# Altium PCB Archim_Panel_1.0a.PcbDoc
Units mil, origin at the board's own origin, x right, y up, seen from the top; angles counter-clockwise.
Board outline 4606.1 x 8609.74 mil, 6 copper layers (Top Layer, Top GND, Power Plane, Mid1, Bot GND, Bottom Layer), stack 61.234 mil thick; 8 components, 0 nets, 12 pads, 0 vias.
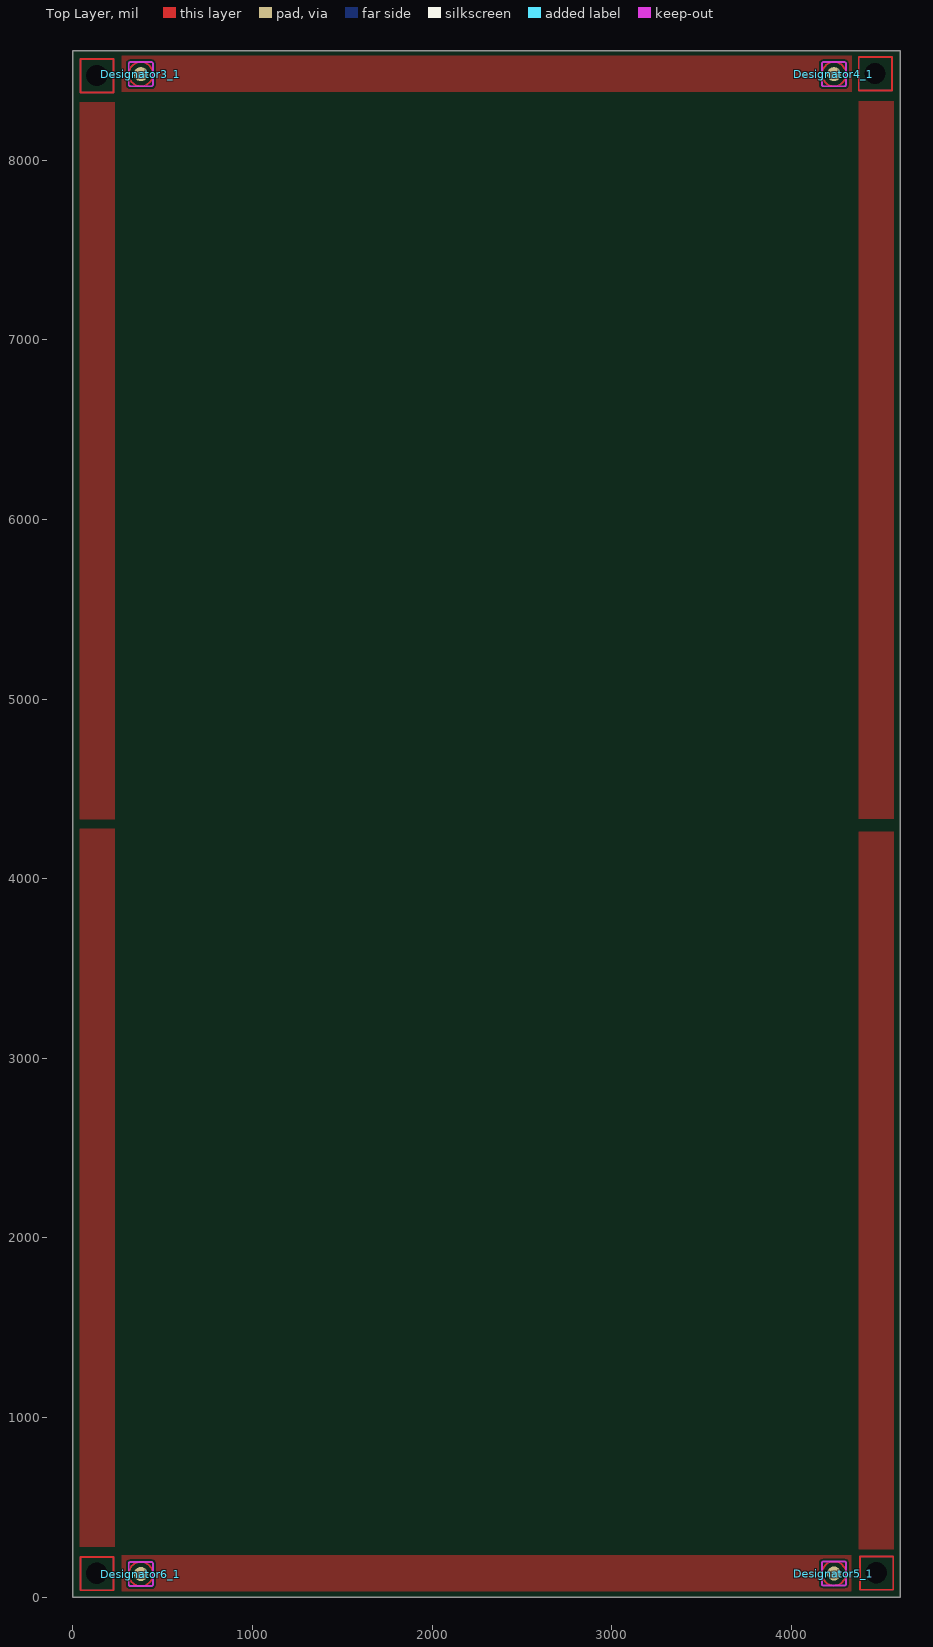
[diagram p0: Top Layer view]
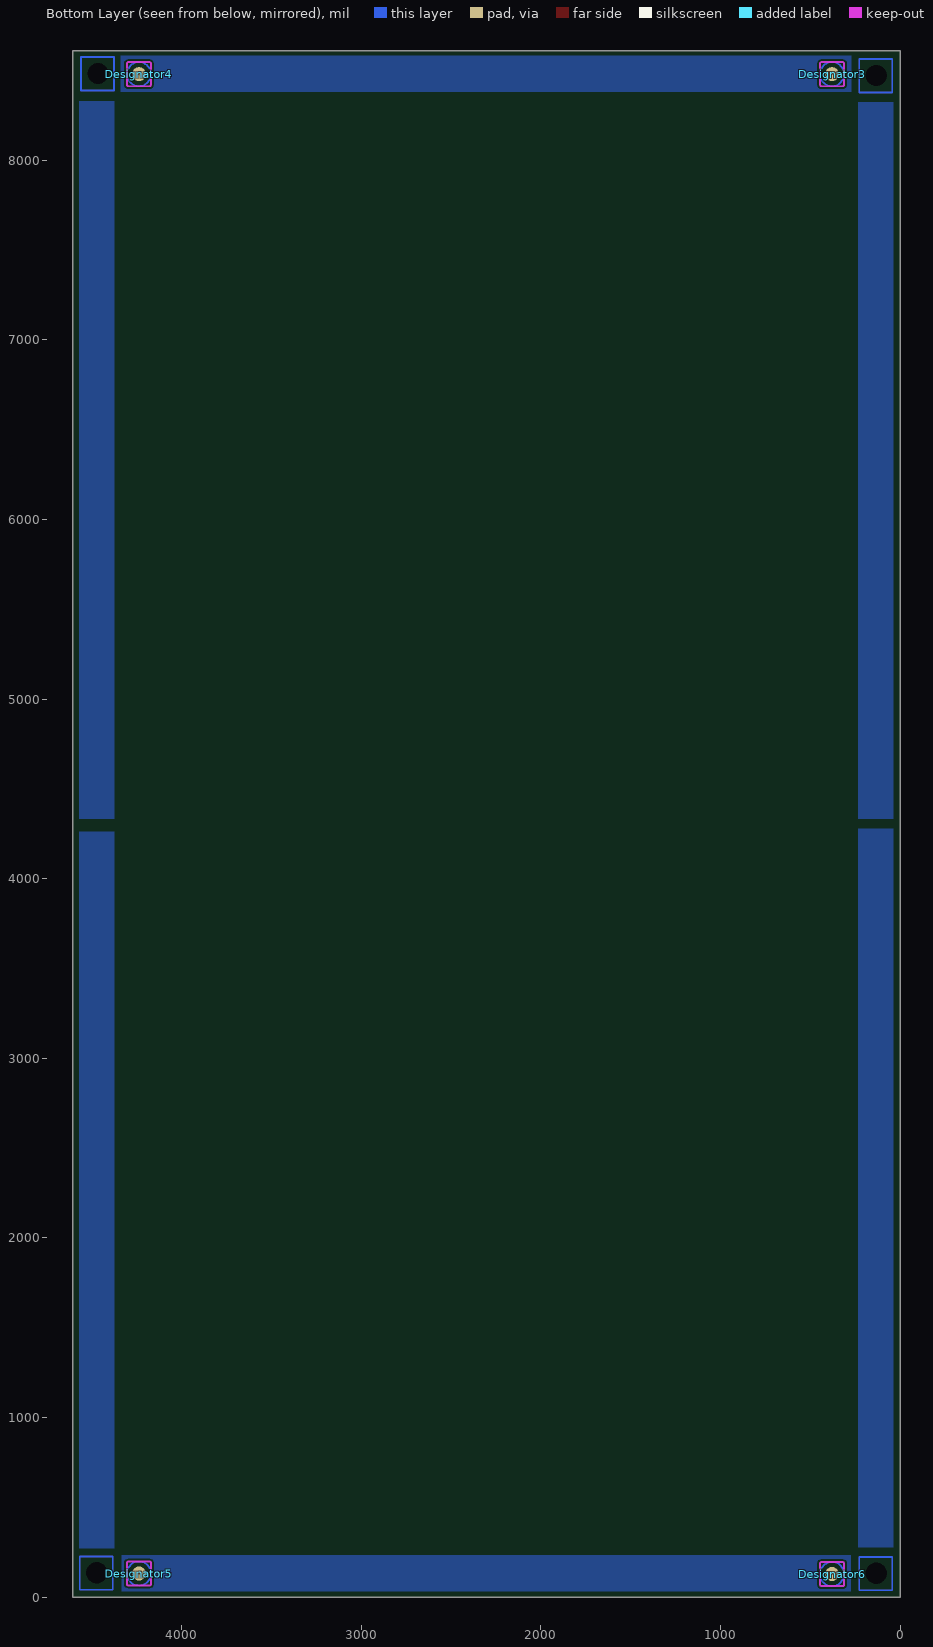
[diagram p1: Bottom Layer view, seen from below]
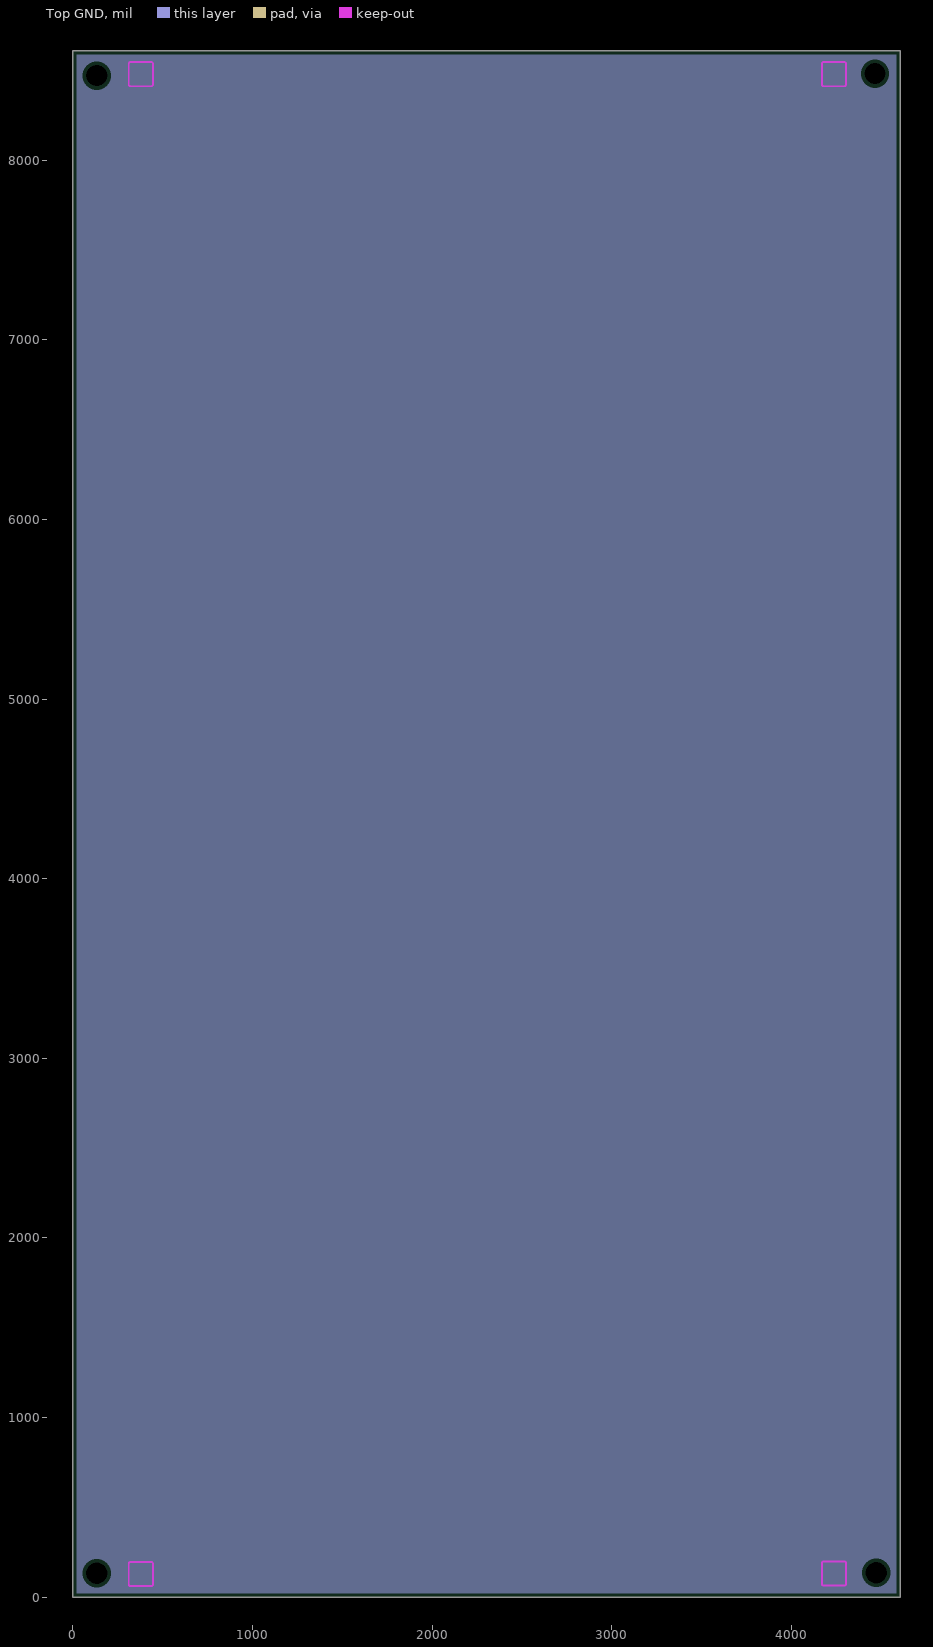
[diagram p2: Top GND, clearances drawn from the general rule]
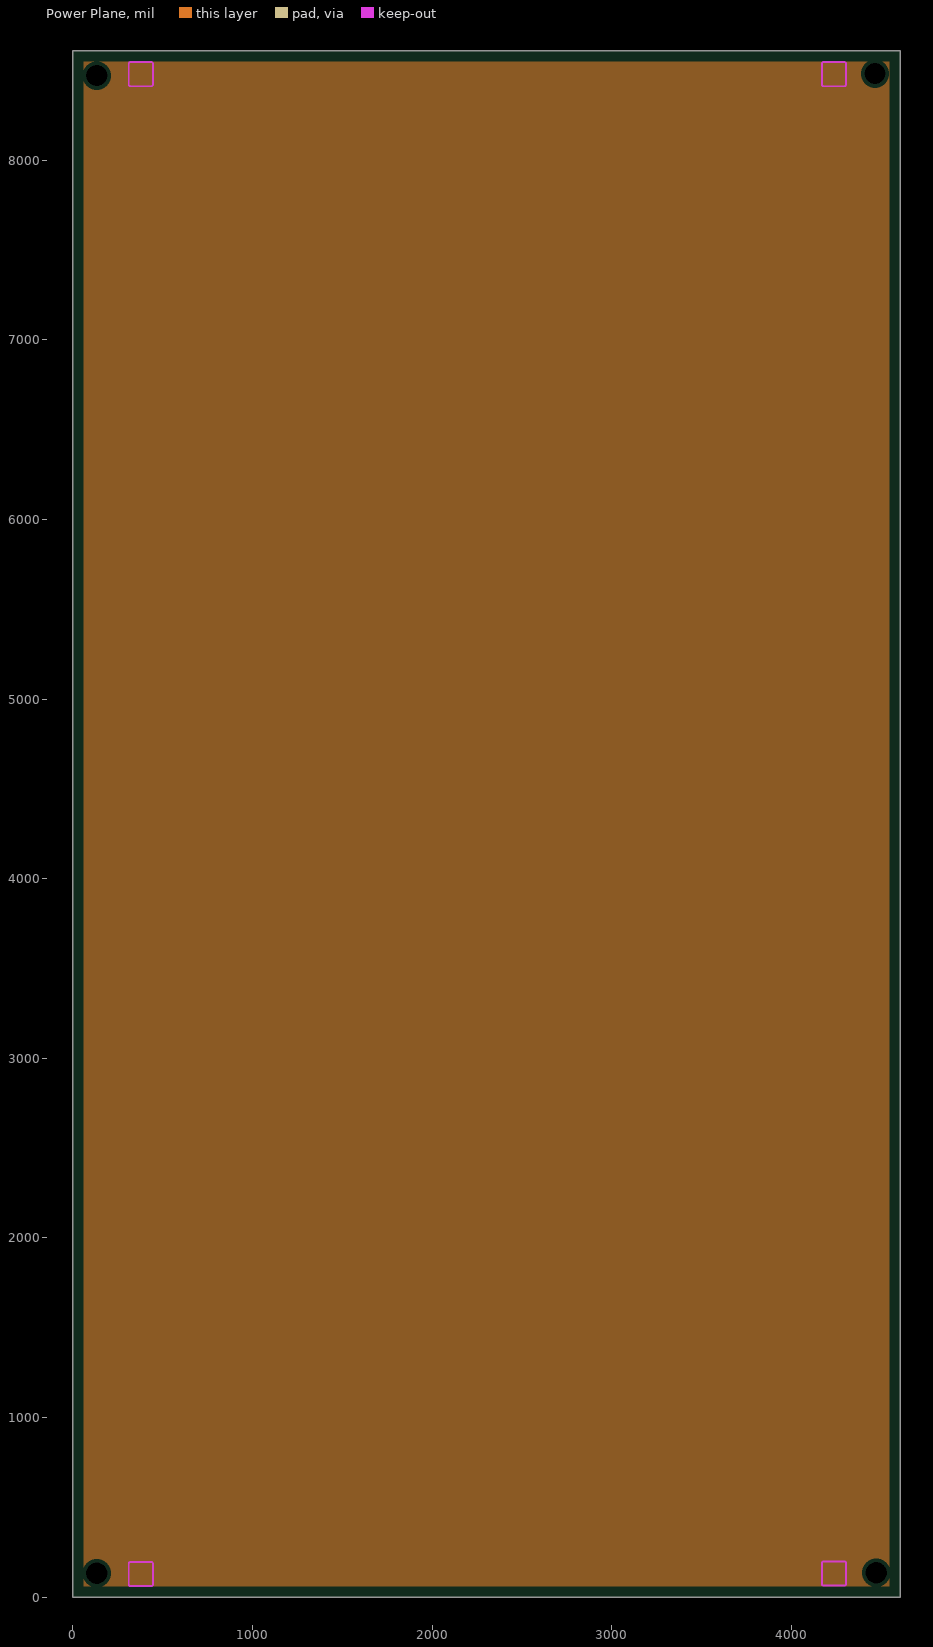
[diagram p3: Power Plane, clearances drawn from the general rule]
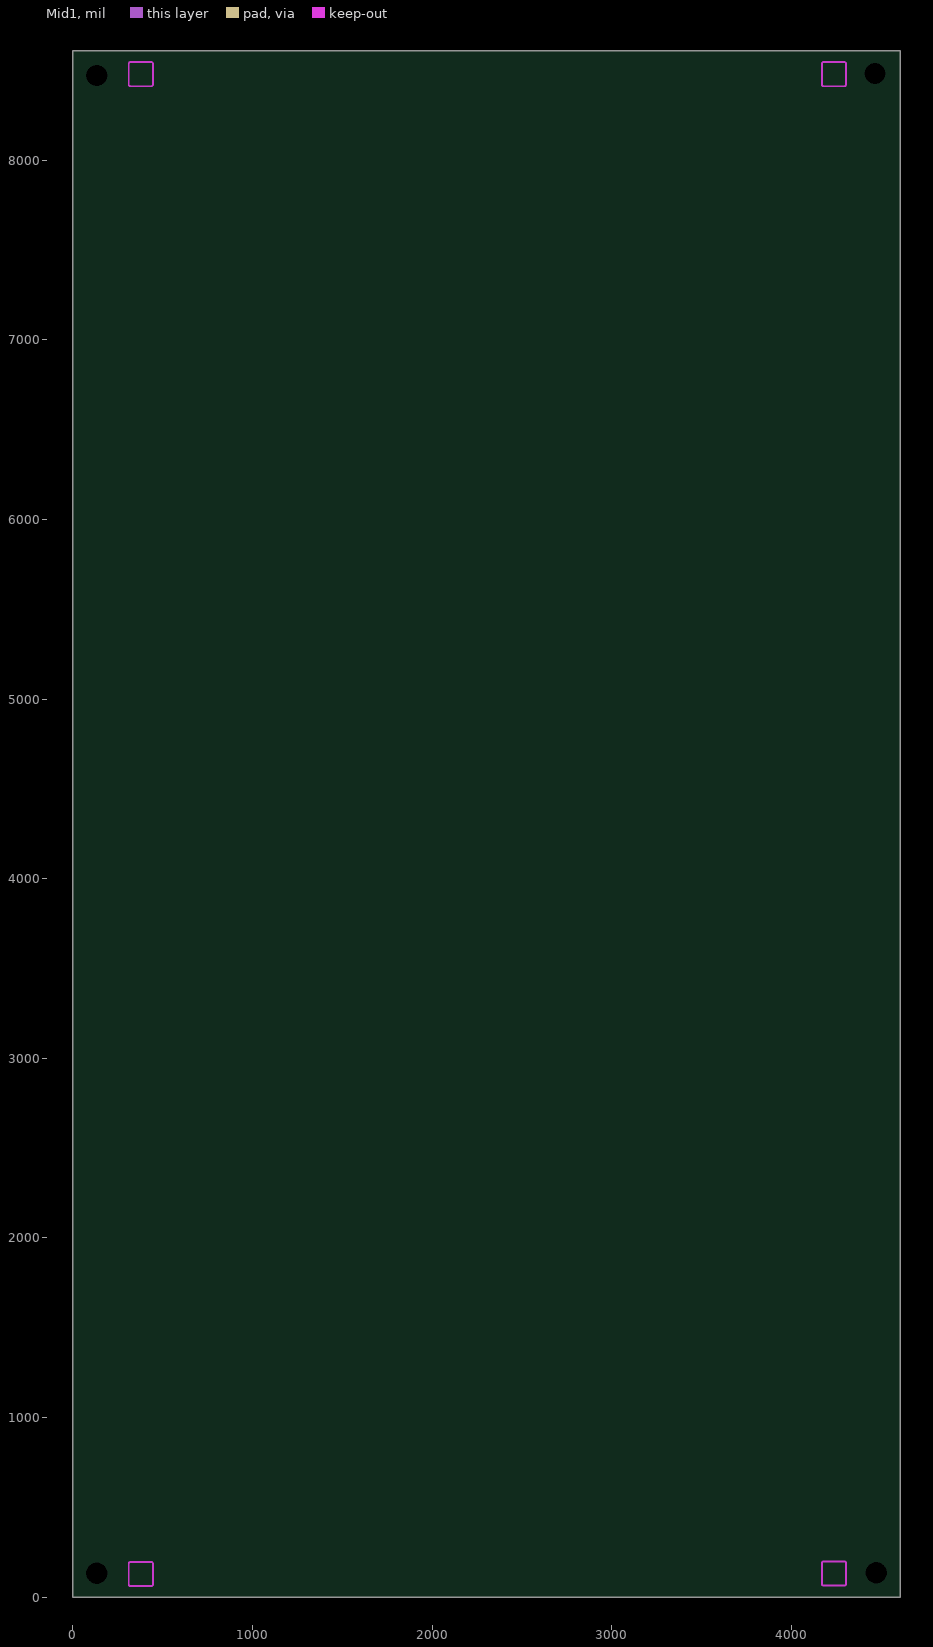
[diagram p4: Mid1]
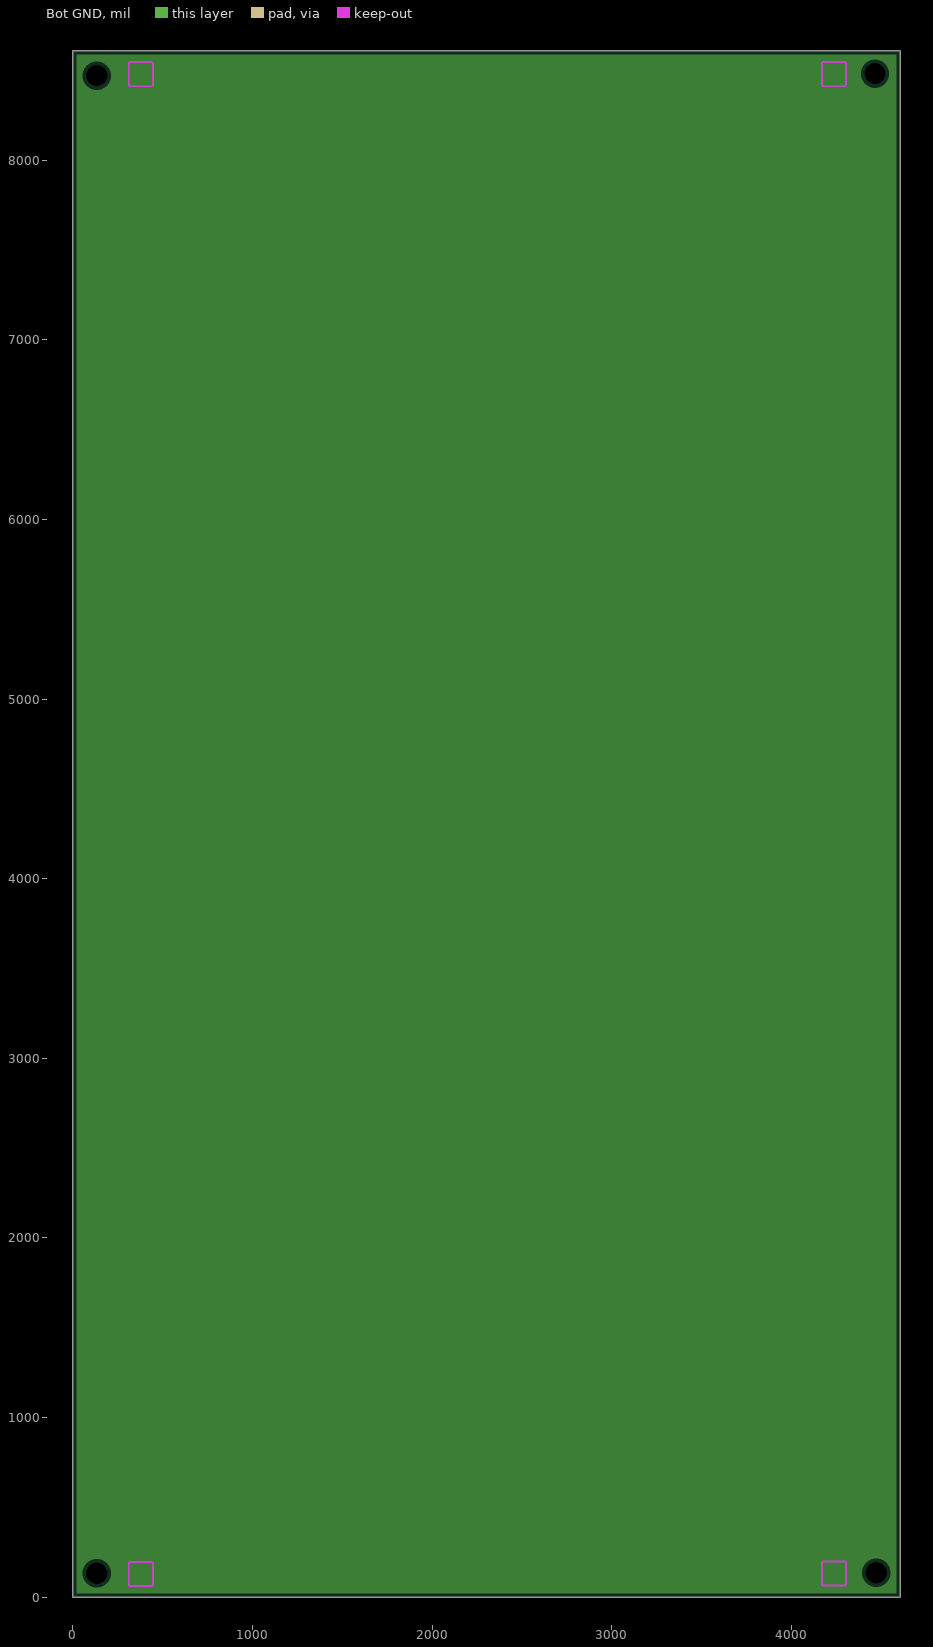
[diagram p5: Bot GND, clearances drawn from the general rule]

## Layer stack, top to bottom
Top Solder: solder mask 0.4, Solder Resist, Dk 3.5
Top Layer: signal copper 2.8
Dielectric1: core 5, FR-4 TG170, Dk 4.2
Top GND: plane copper 1.417
Dielectric3: prepreg 5, FR-4 TG170, Dk 4.2
Power Plane: plane copper 1.4
Dielectric 5: core 30, Dk 4.2
Mid1: signal copper 1.417
Dielectric 4: prepreg 5, Dk 4.2
Bot GND: plane copper 1.4
Dielectric2: core 5, FR-4 TG170, Dk 4.2
Bottom Layer: signal copper 2.8
Bottom Solder: solder mask 0.4, Solder Resist, Dk 3.5

## Board outline
0,0 0,8609.74 4606.1,8609.74 4606.1,0

## Design rules (kind name [scope] priority, off if disabled: settings)
Clearance [All] p1: gap=10 ignorepadtopadclearanceinfootprint=FALSE except(0: Arc-Hole Track-Hole SMDPad-Hole THPad-Hole Via-Hole Fill-Hole Poly-Hole Region-Hole Text-Hole)
HoleSize [All] p1: absolutevalues=TRUE maxlimit=120 minlimit=1 maxpercent=80.000 minpercent=20.000
PlaneClearance [All] p1: clearance=20
PlaneConnect [All] p1: planeconnectstyle=Relief reliefexpansion=20 reliefentries=4 reliefconductorwidth=10 reliefairgap=10
PolygonConnect [All] p1: connectstyle=Relief reliefconductorwidth=10 reliefentries=4 polygonreliefangle="90 Angle" airgapwidth=10
RoutingVias [All] p1: holewidth=28 width=50 viastyle="Through Hole" minholewidth=28 minwidth=50 maxholewidth=28 maxwidth=50
SolderMaskExpansion [All] p1: expansion=4
Width [All] p1: maxlimit=10 minlimit=7 preferedwidth=10 midlayer1_minwidth=10 minimp=50.000000 maximp=50.000000 favimp=50.000000
27 further rules are at their usual default settings.

## Components (designator, comment, footprint, x,y, rotation, side; value= is the part's Value field where it differs from the comment)
Designator3 "Comment" FIDUCIAL-2X3-PANEL 378.94,8479.74 r90 bottom
Designator3_1 "Comment" FIDUCIAL-2X3-PANEL 378.94,8479.74 r90 top
Designator4 "Comment" FIDUCIAL-2X3-PANEL 4237.8,8479.74 r90 bottom
Designator4_1 "Comment" FIDUCIAL-2X3-PANEL 4237.8,8479.74 r90 top
Designator5 "Comment" FIDUCIAL-2X3-PANEL 4237.8,131.89 r90 bottom
Designator5_1 "Comment" FIDUCIAL-2X3-PANEL 4237.8,131.89 r90 top
Designator6 "Comment" FIDUCIAL-2X3-PANEL 378.94,128.94 r90 bottom
Designator6_1 "Comment" FIDUCIAL-2X3-PANEL 378.94,128.94 r90 top

## Footprints (in the part's own frame and the unit in brackets; to place one, negate y for a bottom-side part, rotate by r counter-clockwise, add the part's x,y. Pads: shape width x height; smd on the part's side, far side on the other; paste and mask are expansions set on the pad)
FIDUCIAL-2X3-PANEL [mm]
  rrect100% 2x2 smd paste+0 mask+0.508: 1(0,0)
  Top Layer circle w0.178: c0,0 r1.7
  Keep-Out Layer region: -1.5,-1.7 -1.577,-1.685 -1.641,-1.641 -1.685,-1.577 -1.7,-1.5 -1.7,-1.5 -1.7,1.5 -1.685,1.577 -1.641,1.641 -1.577,1.685 -1.5,1.7 -1.5,1.7 1.5,1.7 1.577,1.685 1.641,1.641 1.685,1.577 1.7,1.5 1.7,1.5 1.7,-1.5 1.685,-1.577 1.641,-1.641 1.577,-1.685 1.5,-1.7 1.5,-1.7
  Keep-Out Layer lines w0.254: -1.5,-1.7 cw(c-1.5,-1.5) -1.7,-1.5 -1.7,1.5 cw(c-1.5,1.5) -1.5,1.7 1.5,1.7 cw(c1.5,1.5) 1.7,1.5 1.7,-1.5 cw(c1.5,-1.5) 1.5,-1.7 -1.5,-1.7
  body extent -1.02,-1.02 1.02,1.02, height 0.02

## Free pads (board coordinates)
  round 0 hole 118.11 unplated paste-3897.64 mask-4.02: 0(132.87,132.87) 1(4473.19,135.83) 2(4466.1,8482.83) 3(132.87,8471.75)

## Nets (pads, with @x,y where several pads share a name; then routed paths per layer and width w, separated by ;. In a path a pad name is that pad's centre, name@x,y a point inside that pad or via, vN(x,y) a via of type N, cw(c..) or ccw(c..) an arc to the next point about the centre after c; other vN are vias at no path point)
pads on no net: Designator3.1 Designator3_1.1 Designator4.1 Designator4_1.1 Designator5.1 Designator5_1.1 Designator6.1 Designator6_1.1
copper on no net: | length 5922.1
  Top Layer w10: 43.31,38.39 43.31,224.41 227.36,224.41 227.36,38.39 43.31,38.39 ; 43.31,8377.26 227.36,8377.26 227.36,8563.28 43.31,8563.28 43.31,8377.26 ; 4376.1,8388.35 4376.1,8574.37 4560.59,8574.37 4560.59,8388.35 4376.1,8388.35 ; 4383.62,41.34 4383.62,227.36 4567.68,227.36 4567.68,41.34 4383.62,41.34
  Bottom Layer w10: 43.31,38.39 43.31,224.41 227.36,224.41 227.36,38.39 43.31,38.39 ; 43.31,8377.26 43.31,8563.28 227.36,8563.28 227.36,8377.26 43.31,8377.26 ; 4376.53,8388.35 4376.53,8574.37 4560.59,8574.37 4560.59,8388.35 4376.53,8388.35 ; 4383.62,41.34 4567.68,41.34 4567.68,227.36 4383.62,227.36 4383.62,41.34

## Polygon pours and split planes (outlines as drawn)
no net on Top Layer "Frame-Copper" (solid, pour order 51): 232.78,8322.83 232.78,4331.83 38.89,4331.83 38.89,8322.83
no net on Top Layer "Frame-Copper" (solid, pour order 53): 273.62,33.46 4332.83,33.46 4332.83,233.27 273.62,233.27
no net on Top Layer "Frame-Copper" (solid, pour order 55): 271.36,8382.44 4337.83,8382.44 4337.83,8582.24 271.36,8582.24
no net on Top Layer "Frame-Copper" (solid, pour order 57): 232.83,4277.83 232.83,279.56 38.94,279.56 38.94,4277.83
no net on Top Layer "Frame-Copper" (solid, pour order 59): 4570,4262.83 4570,267.83 4376.1,267.83 4376.1,4262.83
no net on Top Layer "Frame-Copper" (solid, pour order 61): 4570,8327.83 4570,4332.83 4376.1,4332.83 4376.1,8327.83
no net on Bottom Layer "Frame-Copper" (solid, pour order 63): 273.62,33.46 4332.83,33.46 4332.83,233.27 273.62,233.27
no net on Bottom Layer "Frame-Copper" (solid, pour order 65): 232.83,4277.83 232.83,277.56 38.94,277.56 38.94,4277.83
no net on Bottom Layer "Frame-Copper" (solid, pour order 67): 232.83,8322.83 232.83,4332.83 38.94,4332.83 38.94,8322.83
no net on Bottom Layer "Frame-Copper" (solid, pour order 69): 271.21,8381.5 4337.83,8381.5 4337.83,8581.3 271.21,8581.3
no net on Bottom Layer "Frame-Copper" (solid, pour order 71): 4570,8327.83 4570,4332.83 4376.1,4332.83 4376.1,8327.83
no net on Bottom Layer "Frame-Copper" (solid, pour order 73): 4570,4262.83 4570,271.83 4376.1,271.83 4376.1,4262.83
no net on Top GND (split plane): 4586,20.1 20.1,20.1 20.1,8589.64 4586,8589.64
no net on Power Plane (split plane): 4546.01,60.09 60.09,60.09 60.09,8549.65 4546.01,8549.65
no net on Bot GND (split plane): 4586,20.1 20.1,20.1 20.1,8589.64 4586,8589.64

## Other copper
Top Layer:
  text "Top Layer" at 148.69,9323.4 h75
  text "Layer 1" at 173.69,9198.4 h75
  text "Archim_1.0a" at 173.69,9073.4 h75
Mid1:
  text "Mid Signal" at 2673.69,9323.4 h75
  text "Layer 4" at 2673.69,9198.4 h75
  text "Archim_1.0a" at 2673.69,9073.4 h75
Bottom Layer:
  text "Bot Signal" at 4298.69,9323.4 h75
  text "Layer 6" at 4298.69,9198.4 h75
  text "Archim_1.0a" at 4298.69,9073.4 h75
Bot GND (plane layer: these items are gaps in the copper):
  text "B GND Plane" at 3448.69,9323.4 h75
  text "Layer 5" at 3448.69,9198.4 h75
  text "Archim_1.0a" at 3448.69,9073.4 h75
Power Plane (plane layer: these items are gaps in the copper):
  text "Power Plane" at 1823.69,9323.4 h75
  text "Layer 3" at 1823.69,9198.4 h75
  text "Archim_1.0a" at 1823.69,9073.4 h75
Top GND (plane layer: these items are gaps in the copper):
  text "T GND Plane" at 948.69,9323.4 h75
  text "Layer 2" at 948.69,9198.4 h75
  text "Archim_1.0a" at 948.69,9073.4 h75

## Silkscreen, mask and mechanical layers (free items; w line width, h text height)
Top Overlay:
  text "Top Silkscreen" at 1148.69,9573.4 h75
  text "Archim_1.0a" at 1148.69,9448.4 h75
Bottom Overlay:
  text "Bot Silkscreen" at 2223.69,9573.4 h75
  text "Archim_1.0a" at 2223.69,9448.4 h75
Top Paste:
  text "Top Paste" at 3298.69,9573.4 h75
  text "Archim_1.0a" at 3298.69,9448.4 h75
Top Solder:
  text "Top Soldermask" at 4073.69,9573.4 h75
  text "Archim_1.0a" at 4073.69,9448.4 h75
Bottom Solder:
  text "Bot Soldermask" at 148.69,9823.4 h75
  text "Archim_1.0a" at 148.69,9698.4 h75
Drill Guide:
  text "Drill Guide" at 3448.69,9823.4 h75
  text "Archim_1.0a" at 3448.69,9698.4 h75
Mechanical 2:
  drawing of 399 lines, arcs and shapes, not listed
  text "NOTES (UNLESS SPECIFIED OTHERWISE)" at 5499.41,8454.41 h80
  text "1. FABRICATE PCB IN ACCORDANCE WITH IPC-A-600 CLASS 2 (LATEST REVISION)" at 5597.83,8159.13 h80
  text "2. THE PCB MUST BE LEAD FREE ASSEMBLY PROCESS COMPATIBLE." at 5597.83,7863.86 h80
  text "MUST HANDLE MINIMUM 6 CYCLES - 260C FOR 10 SECONDS." at 5792.83,7707.83 h80
  text "3. LAMINATE AND PREPREG TO BE FR4 TG170" at 5597.83,7470.16 h80
  text "4. PLATING FINISH - BOTH SIDES ENIG GOLD PLATED" at 5597.83,7174.88 h80
  text "5. SOLDERMASK - BOTH SIDES GREEN" at 5597.83,6879.61 h80
  text "6. SOLDER SAMPLES TO BE PROVIDED" at 5597.83,6584.33 h80
  text "7. FINISHED PCB MUST BE MANELIZED FOR ASSEMBLY." at 5597.83,6289.06 h80
  text "8. SILKSCREEN - WHITE EPOXY INK, BOTH SIDES. NO SILK ON PADS" at 5597.83,6003.23 h80
  text "9. SUPPLIER MARKING - ON SOLDER SIDE" at 5597.83,5707.95 h80
  text "ADD ROHS LOGO" at 5794.69,5511.1 h80
  text "ADD UL MARKING AND ID" at 5794.69,5314.25 h80
  text "10. LAYER STACKUP - SEE DETAIL A" at 5597.83,5018.98 h80
  text "DETAIL A" at 5612.83,4172.83 h90
  text "File" at 5792.83,4022.83 h60
  text "Layer" at 6105.09,4000 h60
  text "Name" at 6515,4000 h60
  text "Material" at 7444.74,4000 h60
  text "Thickness" at 8304.51,4000 h60
  text "Constant" at 8954.35,4000 h60
  text "Board Layer Stack" at 9524.21,4000 h60
  text "GTO" at 5802.64,3889.09 h60
  text "1" at 6105.09,3880 h60
  text "Top Overlay" at 6515,3880 h60
  text "GTS" at 5802.64,3769.09 h60
  text "2" at 6105.09,3760 h60
  text "Top Solder" at 6515,3760 h60
  text "Solder Resist" at 7444.74,3760 h60
  text "0.40mil" at 8304.51,3760 h60
  text "3.5" at 8954.35,3760 h60
  text "GTL" at 5802.64,3649.09 h60
  text "3" at 6105.09,3640 h60
  text "Top Layer" at 6515,3640 h60
  text "Copper" at 7444.74,3640 h60
  text "2.80mil" at 8304.51,3640 h60
  text "4" at 6105.09,3520 h60
  text "Dielectric1" at 6515,3520 h60
  text "FR-4 TG170" at 7444.74,3520 h60
  text "5.00mil" at 8304.51,3520 h60
  text "4.2" at 8954.35,3520 h60
  text "GP1" at 5815,3405 h60
  text "5" at 6105.09,3400 h60
  text "Top GND" at 6515,3400 h60
  text "Copper" at 7444.74,3400 h60
  text "1.42mil" at 8304.51,3400 h60
  text "6" at 6105.09,3280 h60
  text "Dielectric3" at 6515,3280 h60
  text "FR-4 TG170" at 7444.74,3280 h60
  text "5.00mil" at 8304.51,3280 h60
  text "4.2" at 8954.35,3280 h60
  text "GP2" at 5815,3170 h60
  text "7" at 6105.09,3160 h60
  text "Power Plane" at 6515,3160 h60
  text "Copper" at 7444.74,3160 h60
  text "1.40mil" at 8304.51,3160 h60
  text "8" at 6105.09,3040 h60
  text "Dielectric 5" at 6515,3040 h60
  text "30.00mil" at 8304.51,3040 h60
  text "4.2" at 8954.35,3040 h60
  text "G1" at 5880,2930 h60
  text "9" at 6105.09,2920 h60
  text "Mid1" at 6515,2920 h60
  text "Copper" at 7444.74,2920 h60
  text "1.42mil" at 8304.51,2920 h60
  text "10" at 6105.09,2800 h60
  text "Dielectric 4" at 6515,2800 h60
  text "5.00mil" at 8304.51,2800 h60
  text "4.2" at 8954.35,2800 h60
  text "GP3" at 5812.64,2684.09 h60
  text "11" at 6105.09,2680 h60
  text "Bot GND" at 6515,2680 h60
  text "Copper" at 7444.74,2680 h60
  text "1.40mil" at 8304.51,2680 h60
  text "12" at 6105.09,2560 h60
  text "Dielectric2" at 6515,2560 h60
  text "FR-4 TG170" at 7444.74,2560 h60
  text "5.00mil" at 8304.51,2560 h60
  text "4.2" at 8954.35,2560 h60
  text "13" at 6105.09,2440 h60
  text "Bottom Layer" at 6515,2440 h60
  text "Copper" at 7444.74,2440 h60
  text "2.80mil" at 8304.51,2440 h60
  text "GBL" at 5817.83,2432.83 h60
  text "14" at 6105.09,2320 h60
  text "Bottom Solder" at 6515,2320 h60
  text "Solder Resist" at 7444.74,2320 h60
  text "0.40mil" at 8304.51,2320 h60
  text "3.5" at 8954.35,2320 h60
  text "GBS" at 5807.83,2317.83 h60
  text "GBO" at 5807.83,2202.83 h60
  text "15" at 6105.09,2200 h60
  text "Bottom Overlay" at 6515,2200 h60
Mechanical 3:
  text "Board Outline" at 148.69,9573.4 h75
  text "Archim_1.0a" at 148.69,9448.4 h75
Mechanical 9:
  text "Board Dimensions" at 2223.69,9823.4 h75
  text "Archim_1.0a" at 2223.69,9698.4 h75
Drill Drawing:
  lines w15: 5674.71,252.83 9553.68,252.83 ; 5674.71,1752.83 9553.68,1752.83 ; 6225.59,102.83 6225.59,1902.83 ; 6923.4,102.83 6923.4,1902.83 ; 8269,102.83 8269,1902.83 ; 8774.88,102.83 8774.88,1902.83 ; 5674.71,102.83 9553.68,102.83 9553.68,1902.83 5674.71,1902.83 5674.71,102.83
  text "Drill Drawing" at 1248.69,9823.4 h75
  text "Archim_1.0a" at 1248.69,9698.4 h75
  text "Symbol" at 5764.71,1797.83 h72
  text "Hit Count" at 6270.59,1797.83 h72
  text "Finished Hole Size" at 6968.4,1797.83 h72
  text "Plated" at 8314,1797.83 h72
  text "Hole Type" at 8819.88,1797.83 h72
  text "4" at 6270.59,1647.83 h60
  text "1.499mm (59.00mil)" at 6968.4,1647.83 h60
  text "PTH" at 8314,1647.83 h60
  text "Round" at 8819.88,1647.83 h60
  text "J" at 5735.62,1637.85 h66.67
  text "4" at 6270.59,1497.83 h60
  text "2.210mm (87.00mil)" at 6968.4,1497.83 h60
  text "PTH" at 8314,1497.83 h60
  text "Round" at 8819.88,1497.83 h60
  text "H" at 5735.62,1487.85 h66.67
  text "6" at 6270.59,1347.83 h60
  text "3.300mm (129.92mil)" at 6968.4,1347.83 h60
  text "NPTH" at 8314,1347.83 h60
  text "Round" at 8819.88,1347.83 h60
  text "D" at 5735.62,1337.85 h66.67
  text "8" at 6270.59,1197.83 h60
  text "0.965mm (38.00mil)" at 6968.4,1197.83 h60
  text "PTH" at 8314,1197.83 h60
  text "Round" at 8819.88,1197.83 h60
  text "I" at 5746.73,1187.85 h66.67
  text "12" at 6270.59,1047.83 h60
  text "3.000mm (118.11mil)" at 6968.4,1047.83 h60
  text "NPTH" at 8314,1047.83 h60
  text "Round" at 8819.88,1047.83 h60
  text "A" at 5735.62,1037.85 h66.67
  text "24" at 6270.59,897.83 h60
  text "1.600mm (63.00mil)" at 6968.4,897.83 h60
  text "PTH" at 8314,897.83 h60
  text "Round" at 8819.88,897.83 h60
  text "G" at 5735.62,887.85 h66.67
  text "32" at 6270.59,747.83 h60
  text "1.397mm (55.00mil)" at 6968.4,747.83 h60
  text "PTH" at 8314,747.83 h60
  text "Round" at 8819.88,747.83 h60
  text "B" at 5735.62,737.85 h66.67
  text "104" at 6270.59,597.83 h60
  text "0.900mm (35.43mil)" at 6968.4,597.83 h60
  text "PTH" at 8314,597.83 h60
  text "Round" at 8819.88,597.83 h60
  text "C" at 5735.62,587.85 h66.67
  text "126" at 6270.59,447.83 h60
  text "1.016mm (40.00mil)" at 6968.4,447.83 h60
  text "PTH" at 8314,447.83 h60
  text "Round" at 8819.88,447.83 h60
  text "E" at 5735.62,437.85 h66.67
  text "3306" at 6270.59,297.83 h60
  text "0.381mm (15.00mil)" at 6968.4,297.83 h60
  text "PTH" at 8314,297.83 h60
  text "Round" at 8819.88,297.83 h60
  text "F" at 5735.62,287.85 h66.67
  text "3626 Total" at 6270.59,147.83 h60
Panel Dimension:
  the board outline again, w10
V-Score:
  lines w10: -4.17,4303.94 4613.83,4303.94 ; 0,253.94 4608.86,253.94 ; 6.95,8353.94 4612.86,8353.94 ; 253.94,3.94 253.94,8612.83 ; 4353.94,0 4353.94,8607.83

## Dimensions
4606.1,0 to 4606.1,8609.74 on Mechanical 2
0,0 to 4606.1,0 on Mechanical 2

## Panel: embedded boards
"..\Archim.PcbDoc" at 253.94,253.94, 2 rows x 1 columns, spacing 4050 x 4100, rotation 0